# Altium PCB display_psb.PcbDoc
Units mm, origin at the board's own origin, x right, y up, seen from the top; angles counter-clockwise.
Board outline 61 x 32 mm, 2 copper layers (Top Layer, Bottom Layer); 8 components, 13 nets, 59 pads, 0 vias.
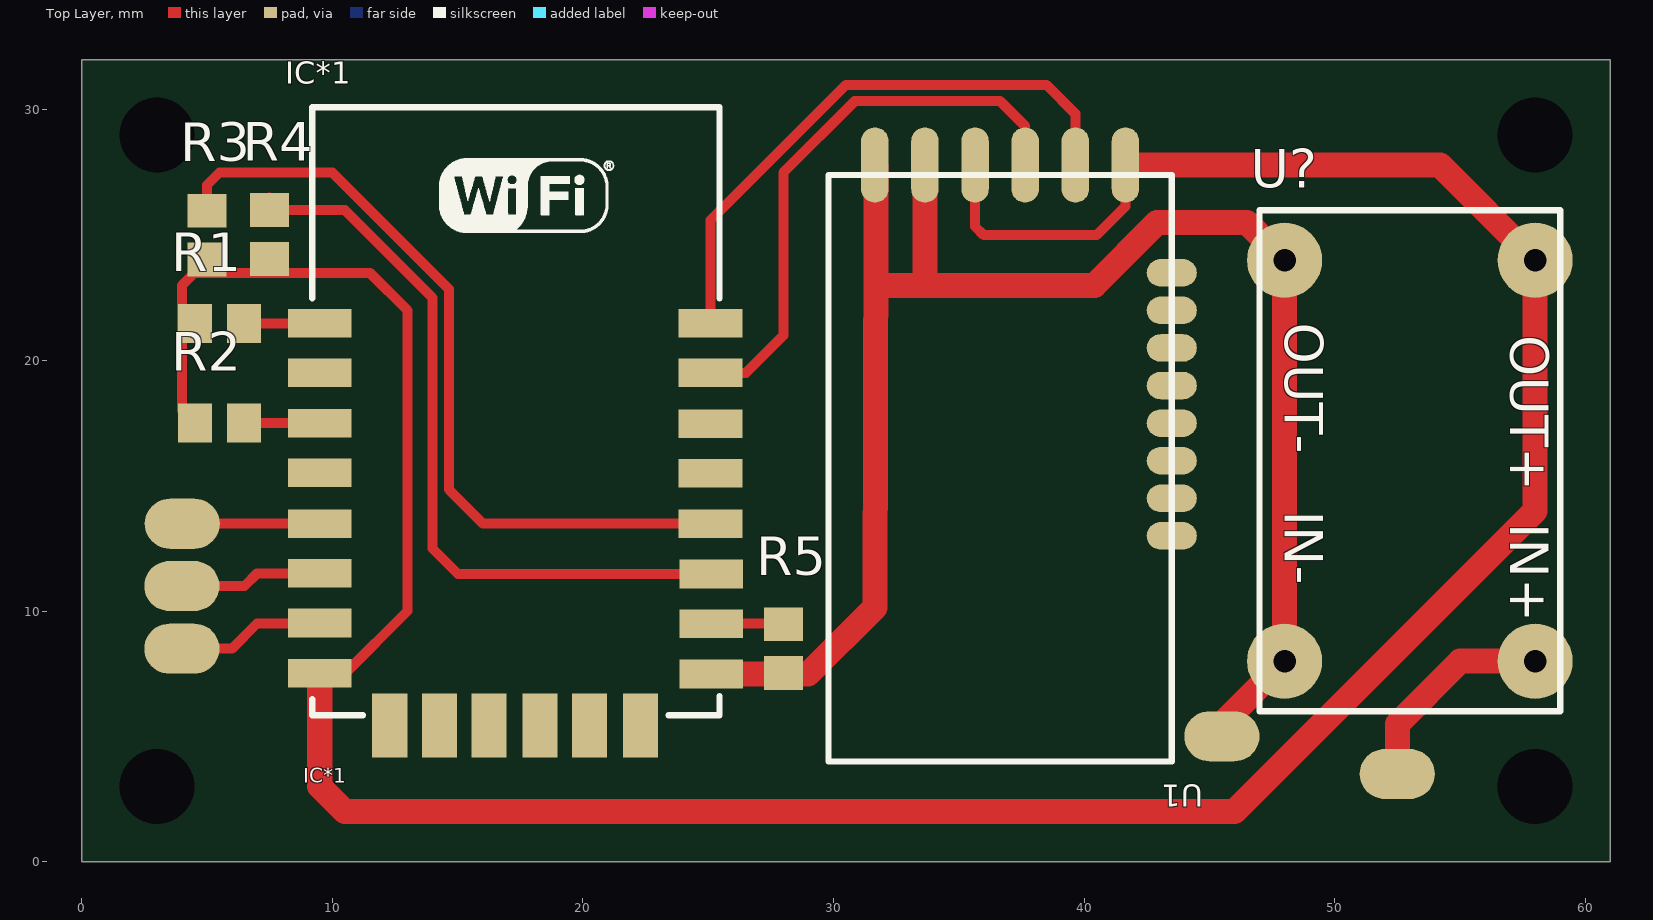
[diagram p0: Top Layer view]
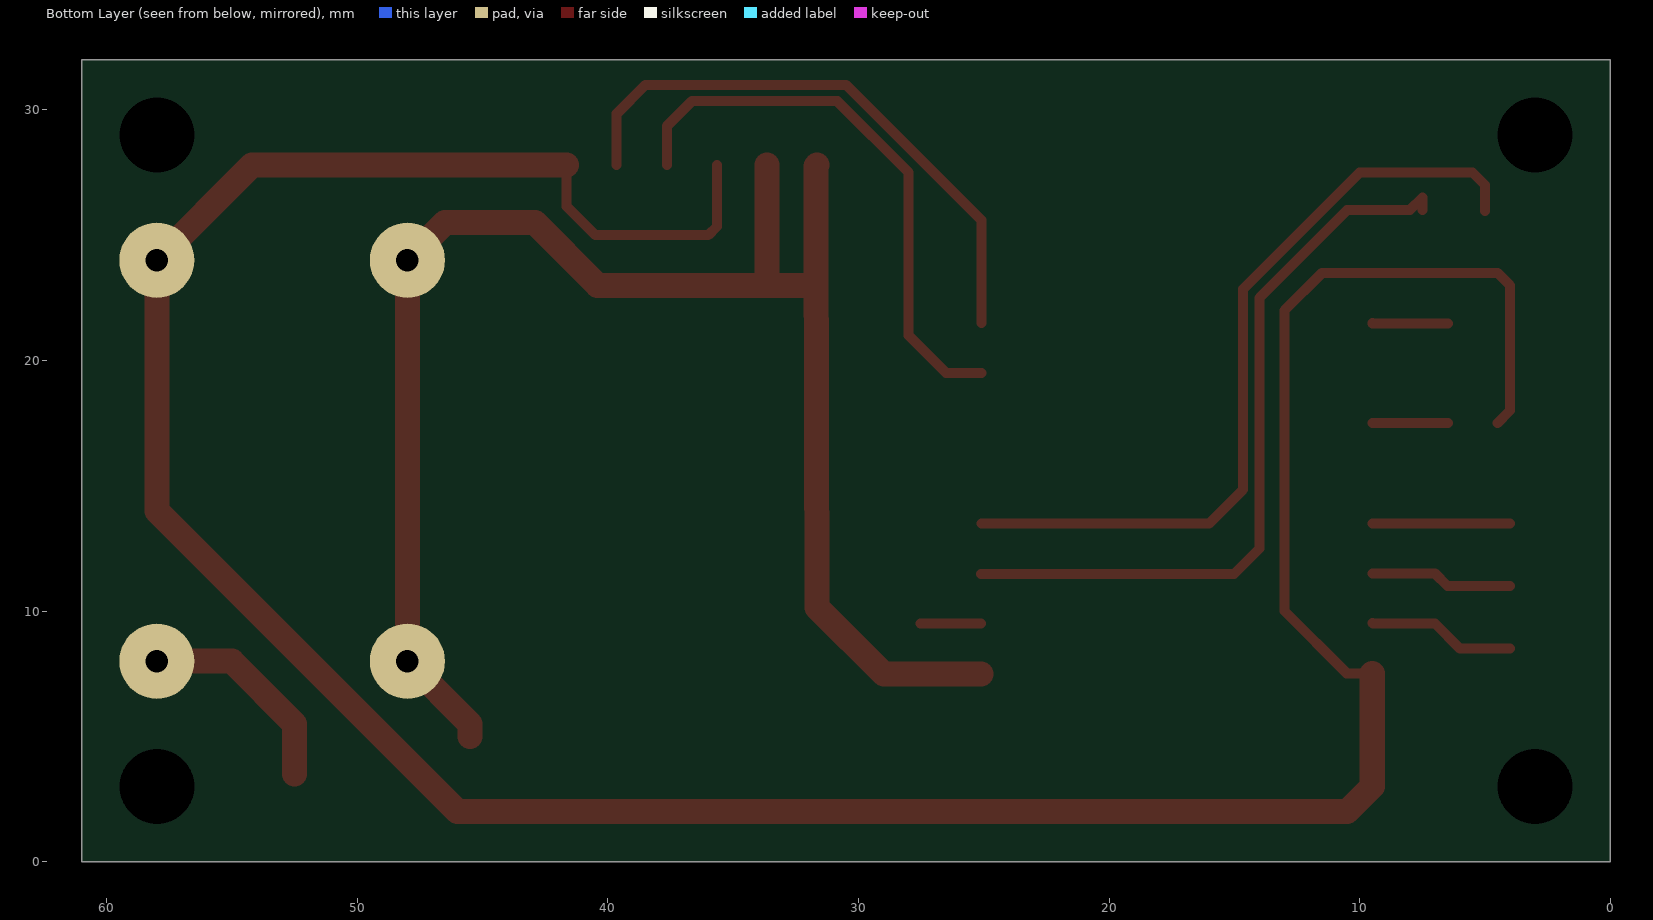
[diagram p1: Bottom Layer view, seen from below]

## Layer stack, top to bottom
Top Solder: solder mask 0.0102, Solder Resist, Dk 3.5
Top Layer: signal copper 0.0356
Dielectric 1: dielectric 0.32, FR-4, Dk 4.8
Bottom Layer: signal copper 0.0356
Bottom Solder: solder mask 0.0102, Solder Resist, Dk 3.5

## Board outline
0,0 61,0 61,32.004 0,32.004

## Design rules (kind name [scope] priority, off if disabled: settings)
Clearance Clearance_1 [All vs InNet('GND')] p1: gap=0.3 ignorepadtopadclearanceinfootprint=FALSE
Clearance [All] p2: gap=0.254 ignorepadtopadclearanceinfootprint=FALSE except(0: Arc-Hole Track-Hole SMDPad-Hole THPad-Hole Via-Hole Fill-Hole Poly-Hole Region-Hole Text-Hole)
PolygonConnect [All] p1: connectstyle=Relief reliefconductorwidth=0.254 reliefentries=4 polygonreliefangle="90 Angle" airgapwidth=0.254
RoutingVias [All] p1: holewidth=0.6 width=1.27 viastyle="Through Hole" minholewidth=0.6 minwidth=1.27 maxholewidth=0.6 maxwidth=1.27
SolderMaskExpansion [All] p1: expansion=0.102
Width [All] p1: maxlimit=1 minlimit=0.3 preferedwidth=0.3
30 further rules are at their usual default settings.

## Components (designator, comment, footprint, x,y, rotation, side; value= is the part's Value field where it differs from the comment)
IC*1 "ESP8266 ESP-12-E" "ESP8266 ESP-12-E" 26.086,5.079 r0 top
R1 "10k" RESC2013X70X40ML20T20 5.5,21.475 r0 top
R2 "10k" RESC2013X70X40ML20T20 5.5,17.5 r0 top
R3 "10k" RESC2013X70X40ML20T20 5,25 r270 top
R4 "10k" RESC2013X70X40ML20T20 7.5,25.025 r270 top
R5 "10k" RESC2013X70X40ML20T20 28,8.5 r270 top
U1 "JDY_40" JDY_40 43.5,13 r180 top
U? "dcdc_mini 360" dcdc_mini_360 58,24 r270 top

## Footprints (in the part's own frame and the unit in brackets; to place one, negate y for a bottom-side part, rotate by r counter-clockwise, add the part's x,y. Pads: shape width x height; smd on the part's side, far side on the other; paste and mask are expansions set on the pad)
dcdc_mini_360 [mm]
  round 3 hole 0.9 unplated paste+0: 1(0,0) 2(16,0) 3(0,-10) 4(16,-10)
  silkscreen extent -2,-11 18,1, body extent -2,-11 17.78,1, height 5
"ESP8266 ESP-12-E" [mil] "ESP8266 ESP-12-E"
  rect 100x45 smd: 1(-653,646) 2(-653,568) 3(-653,489) 4(-653,411) 5(-653,331) 6(-653,253) 7(-653,175) 8(-653,96) 15(-38,95) 16(-38,174) 17(-38,252) 18(-39,331) 19(-39,410) 20(-39,488) 21(-39,568) 22(-39,646)
  rect 55x100 smd: 9(-543,14) 10(-465,14) 11(-387,14) 12(-307,14) 13(-229,14) 14(-149,14)
  silkscreen extent -665,30 -25,985, body extent -658,36 -28,981
JDY_40 [mm]
  oval 2x1.1 smd: 1(0,0) 2(0,-1.5) 3(0,-3) 4(0,-4.5) 5(0,-6) 6(0,-7.5) 7(0,-9) 8(0,-10.5)
  oval 1.1x3 smd: 9(1.85,-14.8) 10(3.85,-14.8) 11(5.85,-14.8) 12(7.85,-14.8) 13(9.85,-14.8) 14(11.85,-14.8)
  silkscreen extent 0,-14.4 13.7,9, body extent -0.07,-14.08 13.62,8.92, height 2.83
RESC2013X70X40ML20T20 [mm] "Chip Resistor, 2-Leads, Body 2.00x1.25mm, IPC Low Density"
  rect 1.35x1.55 smd: 1(-0.975,0) 2(0.975,0)
  body extent -1.1,-0.72 1.1,0.72, height 0.7

## Part data
R1 R2 R3 R4 R5: library part CMP-2001-04440-2, "RES SMD 150K OHM 1% 1/8W 0805", Case-EIA=0805, Manufacturer=Panasonic, Part Number=ERJ-6ENF1503V, Datasheet=http://industrial.panasonic.com/cdbs/www-data/pdf/RDA0000/AOA0000C86.pdf
U1: Package=None, Availability=Unavailable, MF="Advanced Monolithic Systems", MP=JDY_40, Price=None, SnapEDA_Link=https://www.snapeda.com/parts/AMS1117-5.0/Advanced%20Monolithic%20Systems/view-part/?ref=snap

## Free pads (board coordinates)
  round 1.524 hole 3: 1(3,3) 1(3,29) 1(58,3) 1(58,29)
  oval 3x2 smd: 1(4,8.5) 1(4,11) 1(4.013,13.487) 1(45.5,5) 1(52.5,3.5)

## Nets (pads, with @x,y where several pads share a name; then routed paths per layer and width w, separated by ;. In a path a pad name is that pad's centre, name@x,y a point inside that pad or via, vN(x,y) a via of type N, cw(c..) or ccw(c..) an arc to the next point about the centre after c; other vN are vias at no path point)
3.3V: IC*1.8 R1.1 R2.1 R3.2 R4.2 U1.9 U1.12 U?.1 | length 129.1
  Top Layer w0.4: R2.1@4.5,17.5 4,18 4,23 4.5,23.5 11.5,23.5 13,22 13,10 10.518,7.518 IC*1.8 ; U1.12 35.65,25.35 36,25 40.5,25 41.65,26.15 U1.9
  Top Layer w1: IC*1.8 9.5,3 10.5,2 46,2 58,14 U?.1 54.2,27.8 U1.9
12V: pad.1@52.5,3.5 U?.2 | length 8.5
  Top Layer w1: pad.1@52.5,3.5 52.5,5.5 55,8 U?.2
cloc: IC*1.5 pad.1@4.013,13.487 | length 5.5
  Top Layer w0.4: pad.1@4.013,13.487 IC*1.5
data: IC*1.7 pad.1@4,8.5 | length 5.9
  Top Layer w0.4: pad.1@4,8.5 6,8.5 7,9.5 9.476,9.5 IC*1.7
GND: IC*1.15 pad.1@45.5,5 R5.2 U1.13 U1.14 U?.3 U?.4 | length 68
  Top Layer w1: IC*1.15 28.992,7.492 31.65,10.15 31.7,25.575 31.7,27.75 U1.14 ; 31.775,23 33.625,23 ; U1.13 33.65,23.025 33.625,23 ; pad.1@45.5,5 45.5,5.5 U?.4 U?.3 46.5,25.5 42.914,25.5 40.414,23 33.625,23
latc: IC*1.6 pad.1@4,11 | length 5.7
  Top Layer w0.4: pad.1@4,11 6.5,11 7.006,11.506 IC*1.6
NetIC*1_1: IC*1.1 R1.2 | length 3
  Top Layer w0.4: R1.2 9.487,21.475 IC*1.1
NetIC*1_3: IC*1.3 R2.2 | length 3
  Top Layer w0.4: R2.2 IC*1.3
NetIC*1_16: IC*1.16 R5.1 | length 2.4
  Top Layer w0.4: IC*1.16 27.524,9.499 R5.1@27.525,9.5
NetIC*1_17: IC*1.17 R4.1 | length 30.2
  Top Layer w0.4: R4.1 7.5,26.5 8,26 10.5,26 14,22.5 14,12.5 15.02,11.48 IC*1.17
NetIC*1_18: IC*1.18 R3.1 | length 31.8
  Top Layer w0.4: R3.1 5,27 5.5,27.5 10,27.5 14.654,22.846 14.654,14.846 16.013,13.487 IC*1.18
Rx: IC*1.21 U1.11 | length 22.8
  Top Layer w0.4: IC*1.21 26.507,19.507 28,21 28,27.5 30.846,30.346 36.654,30.346 37.65,29.35 U1.11
Tx: IC*1.22 U1.10 | length 23.4
  Top Layer w0.4: IC*1.22 25.096,25.596 30.5,31 38.5,31 39.65,29.85 U1.10
pads on no net: IC*1.2 IC*1.4 IC*1.9 IC*1.10 IC*1.11 IC*1.12 IC*1.13 IC*1.14 IC*1.19 IC*1.20 U1.1 U1.2 U1.3 U1.4 U1.5 U1.6 U1.7 U1.8

## Silkscreen, mask and mechanical layers (free items; w line width, h text height)
bord:
  the board outline again, w0.2

## Text inside footprints (layer, text, board x,y; h text height)
IC*1: Mechanical 13 "ANTENNA AREA" at 9.501,29.478 h0.25; Mechanical 13 "CUTOUT POLYGON" at 9.501,28.97 h0.25
U?: Top Overlay "IN+" at 57,13.5 h1.52 r270; Top Overlay "IN-" at 48,14 h1.52 r270; Top Overlay "OUT-" at 48,21.5 h1.52 r270; Top Overlay "OUT+" at 57,21 h1.52 r270